# Altium PCB PCBf.PcbDoc
Units mm, origin at the board's own origin, x right, y up, seen from the top; angles counter-clockwise.
Board outline 100 x 50 mm, 2 copper layers (Top Layer, Bottom Layer); 119 components, 58 nets, 324 pads, 0 vias.
Unrouted connection lines stored in the file: 246.
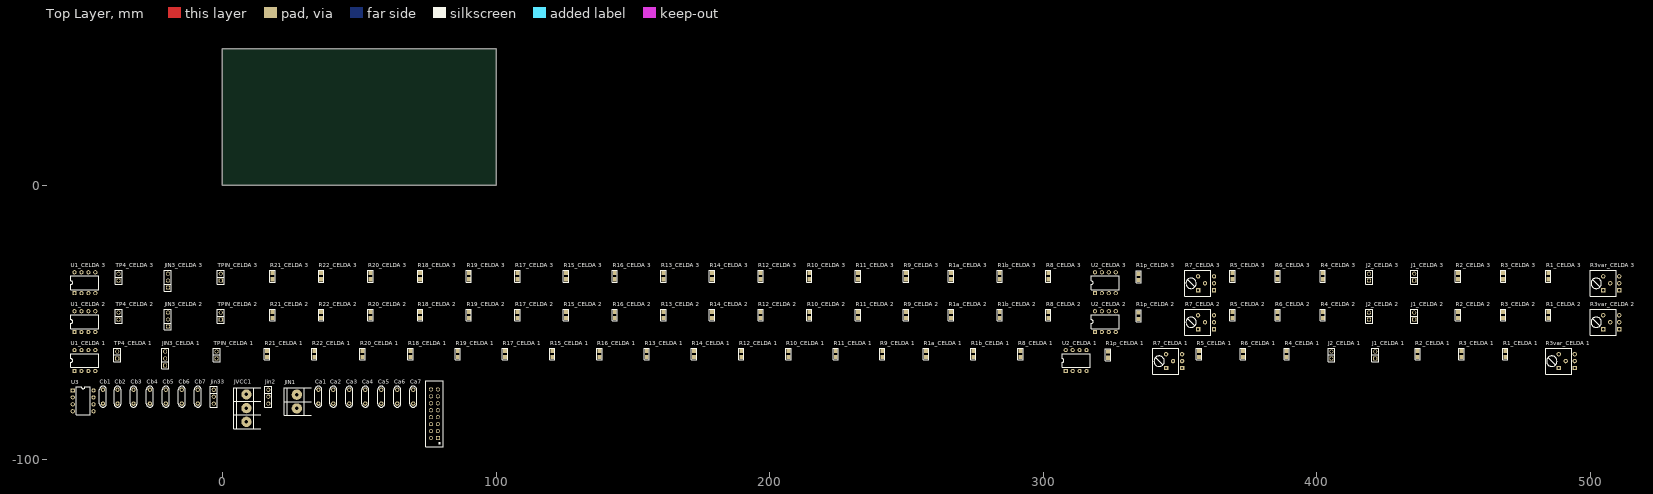
[diagram p0: Top Layer view]
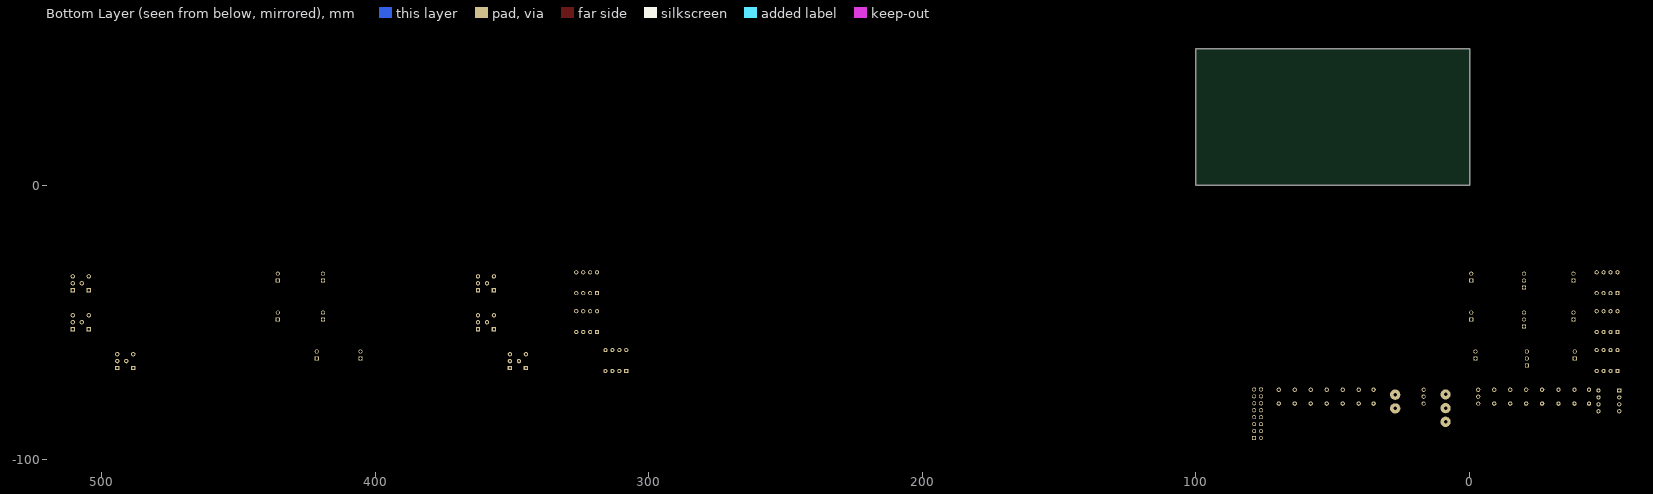
[diagram p1: Bottom Layer view, seen from below]

## Layer stack, top to bottom
Top Solder: solder mask 0.0102, Solder Resist, Dk 3.5
Top Layer: signal copper 0.0356
Dielectric 1: dielectric 0.32, FR-4, Dk 4.8
Bottom Layer: signal copper 0.0356
Bottom Solder: solder mask 0.0102, Solder Resist, Dk 3.5

## Board outline
0,0 100,0 100,50 0,50

## Design rules (kind name [scope] priority, off if disabled: settings)
Clearance [All] p1: gap=0.254 ignorepadtopadclearanceinfootprint=FALSE except(0: Arc-Hole Track-Hole SMDPad-Hole THPad-Hole Via-Hole Fill-Hole Poly-Hole Region-Hole Text-Hole)
PolygonConnect [All] p1: connectstyle=Relief reliefconductorwidth=0.254 reliefentries=4 polygonreliefangle="90 Angle" airgapwidth=0.254
RoomDefinition filter [InComponentClass('filter')] p1: confinementstyle=ConfineIn formatcopy=TRUE lockcomponents=FALSE outline -55.753,-95.758 80.899,-95.758 80.899,-70.612 -55.753,-70.612
RoomDefinition "CELDA 3" [InComponentClass('CELDA 3')] p2: confinementstyle=ConfineIn formatcopy=TRUE lockcomponents=FALSE outline -55.88,-40.767 519.811,-40.767 519.811,-27.94 -55.88,-27.94
RoomDefinition "CELDA 2" [InComponentClass('CELDA 2')] p3: confinementstyle=ConfineIn formatcopy=TRUE lockcomponents=FALSE outline -55.88,-54.991 519.811,-54.991 519.811,-42.164 -55.88,-42.164
RoomDefinition "CELDA 1" [InComponentClass('CELDA 1')] p4: confinementstyle=ConfineIn formatcopy=TRUE lockcomponents=FALSE outline -55.88,-69.215 503.047,-69.215 503.047,-56.388 -55.88,-56.388
RoutingVias [All] p1: holewidth=0.711 width=1.27 viastyle="Through Hole" minholewidth=0.711 minwidth=1.27 maxholewidth=0.711 maxwidth=1.27
SolderMaskExpansion [All] p1: expansion=0.102
Width [All] p1: maxlimit=0.254 minlimit=0.254 preferedwidth=0.254
30 further rules are at their usual default settings.

## Classes and differential pairs
channel class fleischerTowR1: "CELDA 1" "CELDA 2" "CELDA 3"
component class filter: Ca1 Ca2 Ca3 Ca4 Ca5 Ca6 Ca7 Cb1 Cb2 Cb3 Cb4 Cb5 Cb6 Cb7 JIN1 Jin2 Jin33 JVCC1 U3 ""
component class "CELDA 3": "J1_CELDA 3" "J2_CELDA 3" "JIN3_CELDA 3" "R1_CELDA 3" "R1a_CELDA 3" "R1b_CELDA 3" "R1p_CELDA 3" "R2_CELDA 3" "R3_CELDA 3" "R3var_CELDA 3" "R4_CELDA 3" "R5_CELDA 3" "R6_CELDA 3" "R7_CELDA 3" "R8_CELDA 3" "R9_CELDA 3" "R10_CELDA 3" "R11_CELDA 3" "R12_CELDA 3" "R13_CELDA 3" "R14_CELDA 3" "R15_CELDA 3" "R16_CELDA 3" "R17_CELDA 3" "R18_CELDA 3" "R19_CELDA 3" "R20_CELDA 3" "R21_CELDA 3" "R22_CELDA 3" "TP4_CELDA 3" "TPIN_CELDA 3" "U1_CELDA 3" "U2_CELDA 3"
component class "CELDA 2": "J1_CELDA 2" "J2_CELDA 2" "JIN3_CELDA 2" "R1_CELDA 2" "R1a_CELDA 2" "R1b_CELDA 2" "R1p_CELDA 2" "R2_CELDA 2" "R3_CELDA 2" "R3var_CELDA 2" "R4_CELDA 2" "R5_CELDA 2" "R6_CELDA 2" "R7_CELDA 2" "R8_CELDA 2" "R9_CELDA 2" "R10_CELDA 2" "R11_CELDA 2" "R12_CELDA 2" "R13_CELDA 2" "R14_CELDA 2" "R15_CELDA 2" "R16_CELDA 2" "R17_CELDA 2" "R18_CELDA 2" "R19_CELDA 2" "R20_CELDA 2" "R21_CELDA 2" "R22_CELDA 2" "TP4_CELDA 2" "TPIN_CELDA 2" "U1_CELDA 2" "U2_CELDA 2"
component class "CELDA 1": "J1_CELDA 1" "J2_CELDA 1" "JIN3_CELDA 1" "R1_CELDA 1" "R1a_CELDA 1" "R1b_CELDA 1" "R1p_CELDA 1" "R2_CELDA 1" "R3_CELDA 1" "R3var_CELDA 1" "R4_CELDA 1" "R5_CELDA 1" "R6_CELDA 1" "R7_CELDA 1" "R8_CELDA 1" "R9_CELDA 1" "R10_CELDA 1" "R11_CELDA 1" "R12_CELDA 1" "R13_CELDA 1" "R14_CELDA 1" "R15_CELDA 1" "R16_CELDA 1" "R17_CELDA 1" "R18_CELDA 1" "R19_CELDA 1" "R20_CELDA 1" "R21_CELDA 1" "R22_CELDA 1" "TP4_CELDA 1" "TPIN_CELDA 1" "U1_CELDA 1" "U2_CELDA 1"

## Components (designator, comment, footprint, x,y, rotation, side; value= is the part's Value field where it differs from the comment)
Ca1 "CAP" CAP200 35.052,-77.216 r90 top
Ca2 "CAP" CAP200 40.513,-77.216 r90 top
Ca3 "CAP" CAP200 46.355,-77.216 r90 top
Ca4 "CAP" CAP200 52.197,-77.216 r90 top
Ca5 "CAP" CAP200 58.039,-77.216 r90 top
Ca6 "CAP" CAP200 63.881,-77.216 r90 top
Ca7 "CAP" CAP200 69.723,-77.216 r90 top
Cb1 "CAP" CAP200 -43.688,-77.216 r90 top
Cb2 "CAP" CAP200 -38.354,-77.216 r90 top
Cb3 "CAP" CAP200 -32.512,-77.216 r90 top
Cb4 "CAP" CAP200 -26.543,-77.216 r90 top
Cb5 "CAP" CAP200 -20.701,-77.216 r90 top
Cb6 "CAP" CAP200 -14.859,-77.216 r90 top
Cb7 "CAP" CAP200 -9.017,-77.216 r90 top
"J1_CELDA 1" "C2" SIP2 421.386,-61.976 r90 top (schematic designator J1)
"J1_CELDA 2" "C2" SIP2 435.61,-47.752 r90 top (schematic designator J1)
"J1_CELDA 3" "C2" SIP2 435.61,-33.528 r90 top (schematic designator J1)
"J2_CELDA 1" "C1" SIP2 405.384,-61.976 r90 top (schematic designator J2)
"J2_CELDA 2" "C1" SIP2 419.1,-47.752 r90 top (schematic designator J2)
"J2_CELDA 3" "C1" SIP2 419.1,-33.528 r90 top (schematic designator J2)
JIN1 "BORNERA 2" BORNERA2 27.178,-78.994 r0 top
Jin2 "JUMPER" JUMPER3TH 16.764,-74.676 r0 top
"JIN3_CELDA 1" "JUMPER" JUMPER3 -20.955,-63.246 r90 top (schematic designator JIN3)
"JIN3_CELDA 2" "JUMPER" JUMPER3 -19.939,-49.022 r90 top (schematic designator JIN3)
"JIN3_CELDA 3" "JUMPER" JUMPER3 -19.939,-34.798 r90 top (schematic designator JIN3)
Jin33 "JUMPER" JUMPER3TH -3.175,-74.676 r0 top
JVCC1 "BORNERA 3" BORNERA3 8.763,-81.407 r0 top
"R1_CELDA 1" "RES" 0805 468.884,-61.595 r90 top (schematic designator R1)
"R1_CELDA 2" "RES" 0805 484.632,-47.371 r90 top (schematic designator R1)
"R1_CELDA 3" "RES" 0805 484.632,-33.147 r90 top (schematic designator R1)
"R1a_CELDA 1" "RES" 0805 257.175,-61.595 r90 top (schematic designator R1a)
"R1a_CELDA 2" "RES" 0805 266.319,-47.371 r90 top (schematic designator R1a)
"R1a_CELDA 3" "RES" 0805 266.319,-33.147 r90 top (schematic designator R1a)
"R1b_CELDA 1" "RES" 0805 274.447,-61.595 r90 top (schematic designator R1b)
"R1b_CELDA 2" "RES" 0805 284.099,-47.371 r90 top (schematic designator R1b)
"R1b_CELDA 3" "RES" 0805 284.099,-33.147 r90 top (schematic designator R1b)
"R1p_CELDA 1" "RES" 0805 323.723,-61.849 r90 top (schematic designator R1p)
"R1p_CELDA 2" "RES" 0805 334.899,-47.625 r90 top (schematic designator R1p)
"R1p_CELDA 3" "RES" 0805 334.899,-33.401 r90 top (schematic designator R1p)
"R2_CELDA 1" "RES" 0805 436.88,-61.595 r90 top (schematic designator R2)
"R2_CELDA 2" "RES" 0805 451.612,-47.371 r90 top (schematic designator R2)
"R2_CELDA 3" "RES" 0805 451.612,-33.147 r90 top (schematic designator R2)
"R3_CELDA 1" "RES" 0805 452.882,-61.595 r90 top (schematic designator R3)
"R3_CELDA 2" "RES" 0805 468.122,-47.371 r90 top (schematic designator R3)
"R3_CELDA 3" "RES" 0805 468.122,-33.147 r90 top (schematic designator R3)
"R3var_CELDA 1" "PRESET" "PRESET H" 488.442,-64.262 r90 top (schematic designator R3var)
"R3var_CELDA 2" "PRESET" "PRESET H" 504.698,-50.038 r90 top (schematic designator R3var)
"R3var_CELDA 3" "PRESET" "PRESET H" 504.698,-35.814 r90 top (schematic designator R3var)
"R4_CELDA 1" "RES" 0805 389.001,-61.595 r90 top (schematic designator R4)
"R4_CELDA 2" "RES" 0805 402.209,-47.371 r90 top (schematic designator R4)
"R4_CELDA 3" "RES" 0805 402.209,-33.147 r90 top (schematic designator R4)
"R5_CELDA 1" "RES" 0805 356.997,-61.595 r90 top (schematic designator R5)
"R5_CELDA 2" "RES" 0805 369.189,-47.371 r90 top (schematic designator R5)
"R5_CELDA 3" "RES" 0805 369.189,-33.147 r90 top (schematic designator R5)
"R6_CELDA 1" "RES" 0805 372.999,-61.595 r90 top (schematic designator R6)
"R6_CELDA 2" "RES" 0805 385.699,-47.371 r90 top (schematic designator R6)
"R6_CELDA 3" "RES" 0805 385.699,-33.147 r90 top (schematic designator R6)
"R7_CELDA 1" "PRESET" "PRESET H" 344.932,-64.262 r90 top (schematic designator R7)
"R7_CELDA 2" "PRESET" "PRESET H" 356.616,-50.038 r90 top (schematic designator R7)
"R7_CELDA 3" "PRESET" "PRESET H" 356.616,-35.814 r90 top (schematic designator R7)
"R8_CELDA 1" "RES" 0805 291.719,-61.595 r90 top (schematic designator R8)
"R8_CELDA 2" "RES" 0805 301.879,-47.371 r90 top (schematic designator R8)
"R8_CELDA 3" "RES" 0805 301.879,-33.147 r90 top (schematic designator R8)
"R9_CELDA 1" "RES" 0805 241.173,-61.595 r90 top (schematic designator R9)
"R9_CELDA 2" "RES" 0805 249.809,-47.371 r90 top (schematic designator R9)
"R9_CELDA 3" "RES" 0805 249.809,-33.147 r90 top (schematic designator R9)
"R10_CELDA 1" "RES" 0805 206.883,-61.595 r90 top (schematic designator R10)
"R10_CELDA 2" "RES" 0805 214.503,-47.371 r90 top (schematic designator R10)
"R10_CELDA 3" "RES" 0805 214.503,-33.147 r90 top (schematic designator R10)
"R11_CELDA 1" "RES" 0805 224.155,-61.595 r90 top (schematic designator R11)
"R11_CELDA 2" "RES" 0805 232.283,-47.371 r90 top (schematic designator R11)
"R11_CELDA 3" "RES" 0805 232.283,-33.147 r90 top (schematic designator R11)
"R12_CELDA 1" "RES" 0805 189.611,-61.595 r90 top (schematic designator R12)
"R12_CELDA 2" "RES" 0805 196.723,-47.371 r90 top (schematic designator R12)
"R12_CELDA 3" "RES" 0805 196.723,-33.147 r90 top (schematic designator R12)
"R13_CELDA 1" "RES" 0805 155.067,-61.595 r90 top (schematic designator R13)
"R13_CELDA 2" "RES" 0805 161.163,-47.371 r90 top (schematic designator R13)
"R13_CELDA 3" "RES" 0805 161.163,-33.147 r90 top (schematic designator R13)
"R14_CELDA 1" "RES" 0805 172.339,-61.595 r90 top (schematic designator R14)
"R14_CELDA 2" "RES" 0805 178.943,-47.371 r90 top (schematic designator R14)
"R14_CELDA 3" "RES" 0805 178.943,-33.147 r90 top (schematic designator R14)
"R15_CELDA 1" "RES" 0805 120.523,-61.595 r90 top (schematic designator R15)
"R15_CELDA 2" "RES" 0805 125.603,-47.371 r90 top (schematic designator R15)
"R15_CELDA 3" "RES" 0805 125.603,-33.147 r90 top (schematic designator R15)
"R16_CELDA 1" "RES" 0805 137.795,-61.595 r90 top (schematic designator R16)
"R16_CELDA 2" "RES" 0805 143.383,-47.371 r90 top (schematic designator R16)
"R16_CELDA 3" "RES" 0805 143.383,-33.147 r90 top (schematic designator R16)
"R17_CELDA 1" "RES" 0805 103.251,-61.595 r90 top (schematic designator R17)
"R17_CELDA 2" "RES" 0805 107.823,-47.371 r90 top (schematic designator R17)
"R17_CELDA 3" "RES" 0805 107.823,-33.147 r90 top (schematic designator R17)
"R18_CELDA 1" "RES" 0805 68.707,-61.595 r90 top (schematic designator R18)
"R18_CELDA 2" "RES" 0805 72.263,-47.371 r90 top (schematic designator R18)
"R18_CELDA 3" "RES" 0805 72.263,-33.147 r90 top (schematic designator R18)
"R19_CELDA 1" "RES" 0805 85.979,-61.595 r90 top (schematic designator R19)
"R19_CELDA 2" "RES" 0805 90.043,-47.371 r90 top (schematic designator R19)
"R19_CELDA 3" "RES" 0805 90.043,-33.147 r90 top (schematic designator R19)
"R20_CELDA 1" "RES" 0805 51.181,-61.595 r90 top (schematic designator R20)
"R20_CELDA 2" "RES" 0805 54.102,-47.371 r90 top (schematic designator R20)
"R20_CELDA 3" "RES" 0805 54.102,-33.147 r90 top (schematic designator R20)
"R21_CELDA 1" "RES" 0805 16.256,-61.595 r90 top (schematic designator R21)
"R21_CELDA 2" "RES" 0805 18.288,-47.371 r90 top (schematic designator R21)
"R21_CELDA 3" "RES" 0805 18.288,-33.147 r90 top (schematic designator R21)
"R22_CELDA 1" "RES" 0805 33.528,-61.595 r90 top (schematic designator R22)
"R22_CELDA 2" "RES" 0805 36.068,-47.371 r90 top (schematic designator R22)
"R22_CELDA 3" "RES" 0805 36.068,-33.147 r90 top (schematic designator R22)
"TP4_CELDA 1" "JUMPER" JUMPER2 -38.481,-61.976 r90 top (schematic designator TP4)
"TP4_CELDA 2" "JUMPER" JUMPER2 -37.973,-47.752 r90 top (schematic designator TP4)
"TP4_CELDA 3" "JUMPER" JUMPER2 -37.973,-33.528 r90 top (schematic designator TP4)
"TPIN_CELDA 1" "JUMPER" JUMPER2 -2.159,-61.976 r90 top (schematic designator TPIN)
"TPIN_CELDA 2" "JUMPER" JUMPER2 -0.635,-47.752 r90 top (schematic designator TPIN)
"TPIN_CELDA 3" "JUMPER" JUMPER2 -0.635,-33.528 r90 top (schematic designator TPIN)
"U1_CELDA 1" "LM833" DIP8 -54.102,-67.818 r90 top (schematic designator U1)
"U1_CELDA 2" "LM833" DIP8 -54.102,-53.594 r90 top (schematic designator U1)
"U1_CELDA 3" "LM833" DIP8 -54.102,-39.37 r90 top (schematic designator U1)
"U2_CELDA 1" "LM833" DIP8 308.229,-67.818 r90 top (schematic designator U2)
"U2_CELDA 2" "LM833" DIP8 318.897,-53.594 r90 top (schematic designator U2)
"U2_CELDA 3" "LM833" DIP8 318.897,-39.37 r90 top (schematic designator U2)
U3 "LM833" DIP8 -54.737,-74.93 r0 top
? "OUTPUT" SIP8*2 78.74,-92.329 r90 top

## Footprints (in the part's own frame and the unit in brackets; to place one, negate y for a bottom-side part, rotate by r counter-clockwise, add the part's x,y. Pads: shape width x height; smd on the part's side, far side on the other; paste and mask are expansions set on the pad)
0805 [mil] "Pasivo 0805"
  rect 60x56 smd: 1(-45,0) 2(45,0)
  silkscreen extent -85,-38 85,38, body extent -40,-25 39,25, height 15
BORNERA2 [mm] "Bornera con Tornillos 5mm separación"
  round 3.75 hole 1.3: 1(0,2.5) 2(0,-2.5)
  silkscreen extent -4.6,-5 5.2,5, body extent -3.76,-4.89 3.94,5.61, height 10
BORNERA3 [mm] "Bornera con Tornillos 5mm separación"
  round 3.75 hole 1.3: 1(0,5) 2(0,0) 3(0,-5)
  silkscreen extent -4.6,-7.5 5.2,7.5, body extent -3.76,-7.39 3.94,8.11, height 10.05
CAP200 [mil]
  round 62 hole 32: 1(-100,0) 2(100,0)
  silkscreen extent -150,-50 150,50, body extent -110,-46 110,44, height 246
DIP8 [mil]
  rect 60x60 hole 32: 1(0,0)
  round 60 hole 32: 2(0,-100) 3(0,-200) 4(0,-300) 5(300,-300) 6(300,-200) 7(300,-100) 8(300,0)
  silkscreen extent 50,-350 250,50, body extent -3,-363 303,63, height 177
JUMPER2 [mm]
  rect 1.5x1.5 hole 1.016: 1(-1.27,0)
  round 1.5 hole 1.016: 2(1.27,0)
  silkscreen extent -2.54,-1.27 2.54,1.27, body extent -2.46,-1.27 2.54,1.27, height 9.5
JUMPER3 [mm]
  rect 1.5x1.5 hole 1.016: 1(-2.54,0)
  round 1.5 hole 1.016: 2(0,0) 3(2.54,0)
  silkscreen extent -3.81,-1.27 3.81,1.27, body extent -3.81,-1.3 3.81,1.27, height 16.15
JUMPER3TH [mil]
  round 60 hole 38: 1(0,0) 2(0,-100) 3(0,-200)
  silkscreen extent -50,-250 50,50, body extent -49,-250 51,50, height 330
"PRESET H" [mil]
  rect 62x62 hole 32: 1(-98.43,-230) 1(-98.42,0)
  round 62 hole 32: 2(1.57,-100) 2(1.57,-230) 3(101.57,0) 3(101.57,-230)
  silkscreen extent -186,-185 189,190, body extent -190,-188 185,188, height 197
SIP2 [mm]
  rect 1.5x1.5 hole 1.016: 1(-1.27,0)
  round 1.5 hole 1.016: 2(1.27,0)
  silkscreen extent -2.54,-1.27 2.54,1.27
SIP8*2 [mm]
  rect 1.5x1.5 hole 1.016: 1(0,0)
  round 1.5 hole 1.016: 2(0,2.54) 3(2.54,0) 4(2.54,2.54) 5(5.08,0) 6(5.08,2.54) 7(7.62,0) 8(7.62,2.54) 9(10.16,0) 10(10.16,2.54) 11(12.7,0) 12(12.7,2.54) 13(15.24,0) 14(15.24,2.54) 15(17.78,0) 16(17.78,2.54)
  silkscreen extent -3.18,-1.91 20.95,4.45, body extent -1.26,-1.3 19.06,3.78, height 10.1

## Part data
"J1_CELDA 1" "J1_CELDA 2" "J1_CELDA 3" "J2_CELDA 1" "J2_CELDA 2" "J2_CELDA 3": library part CON2
Jin2 Jin33: library part JUMPER3TH, "TIRA DE PINES 1x3"
"JIN3_CELDA 1" "JIN3_CELDA 2" "JIN3_CELDA 3": library part JUMPER3
"U1_CELDA 1" "U1_CELDA 2" "U1_CELDA 3" "U2_CELDA 1" "U2_CELDA 2" "U2_CELDA 3" U3: "Dual Audio Operational Amplifier"
?: library part CON8*2

## Nets (pads, with @x,y where several pads share a name; then routed paths per layer and width w, separated by ;. In a path a pad name is that pad's centre, name@x,y a point inside that pad or via, vN(x,y) a via of type N, cw(c..) or ccw(c..) an arc to the next point about the centre after c; other vN are vias at no path point)
GND: "U1_CELDA 1.5" "U1_CELDA 2.5" "U1_CELDA 3.5" "U2_CELDA 1.3" "U2_CELDA 1.5" "U2_CELDA 2.3" "U2_CELDA 2.5" "U2_CELDA 3.3" "U2_CELDA 3.5" ?.13 ?.14 ?.15 ?.16 Ca1.2 Ca2.2 Ca3.2 Ca4.2 Ca5.2 Ca6.2 Ca7.2 Cb1.2 Cb2.2 Cb3.2 Cb4.2 Cb5.2 Cb6.2 Cb7.2 JIN1.2 JVCC1.2 U3.5
NetCb2_1: Cb2.1 Cb3.1 Cb4.1 Cb5.1 Cb6.1 Cb7.1
"NetJ1_CELDA 1_1": "J1_CELDA 1.1" "R8_CELDA 1.2" "R11_CELDA 1.2" "R20_CELDA 1.2" "R22_CELDA 1.2" "U2_CELDA 1.2"
"NetJ1_CELDA 1_2": "J1_CELDA 1.2" "R1_CELDA 1.2" "R3_CELDA 1.2" "R3var_CELDA 1.3" "U2_CELDA 1.1"
"NetJ1_CELDA 2_1": "J1_CELDA 2.1" "R8_CELDA 2.2" "R11_CELDA 2.2" "R20_CELDA 2.2" "R22_CELDA 2.2" "U2_CELDA 2.2"
"NetJ1_CELDA 2_2": "J1_CELDA 2.2" "R1_CELDA 2.2" "R3_CELDA 2.2" "R3var_CELDA 2.3" "U2_CELDA 2.1"
"NetJ1_CELDA 3_1": "J1_CELDA 3.1" "R8_CELDA 3.2" "R11_CELDA 3.2" "R20_CELDA 3.2" "R22_CELDA 3.2" "U2_CELDA 3.2"
"NetJ1_CELDA 3_2": "J1_CELDA 3.2" "R1_CELDA 3.2" "R3_CELDA 3.2" "R3var_CELDA 3.3" "U2_CELDA 3.1"
"NetJ2_CELDA 1_1": "J2_CELDA 1.1" "R1_CELDA 1.1" "R1a_CELDA 1.1" "R1p_CELDA 1.1" "R2_CELDA 1.1" "R3var_CELDA 1.2" "R7_CELDA 1.2" "R12_CELDA 1.2" "R16_CELDA 1.2" "U1_CELDA 1.6"
"NetJ2_CELDA 1_2": "J2_CELDA 1.2" "R1b_CELDA 1.2" "R1p_CELDA 1.2" "R7_CELDA 1.3"
"NetJ2_CELDA 2_1": "J2_CELDA 2.1" "R1_CELDA 2.1" "R1a_CELDA 2.1" "R1p_CELDA 2.1" "R2_CELDA 2.1" "R3var_CELDA 2.2" "R7_CELDA 2.2" "R12_CELDA 2.2" "R16_CELDA 2.2" "U1_CELDA 2.6"
"NetJ2_CELDA 2_2": "J2_CELDA 2.2" "R1b_CELDA 2.2" "R1p_CELDA 2.2" "R7_CELDA 2.3"
"NetJ2_CELDA 3_1": "J2_CELDA 3.1" "R1_CELDA 3.1" "R1a_CELDA 3.1" "R1p_CELDA 3.1" "R2_CELDA 3.1" "R3var_CELDA 3.2" "R7_CELDA 3.2" "R12_CELDA 3.2" "R16_CELDA 3.2" "U1_CELDA 3.6"
"NetJ2_CELDA 3_2": "J2_CELDA 3.2" "R1b_CELDA 3.2" "R1p_CELDA 3.2" "R7_CELDA 3.3"
"NetJIN3_CELDA 1_1": "JIN3_CELDA 1.1" "TP4_CELDA 1.1" "TP4_CELDA 1.2" "U1_CELDA 1.1" "U1_CELDA 1.2"
"NetJIN3_CELDA 2_1": "JIN3_CELDA 2.1" "TP4_CELDA 2.1" "TP4_CELDA 2.2" "U1_CELDA 2.1" "U1_CELDA 2.2"
"NetJIN3_CELDA 3_1": "JIN3_CELDA 3.1" "TP4_CELDA 3.1" "TP4_CELDA 3.2" "U1_CELDA 3.1" "U1_CELDA 3.2"
"NetR1a_CELDA 1_2": "R1a_CELDA 1.2" "R1b_CELDA 1.1"
"NetR1a_CELDA 2_2": "R1a_CELDA 2.2" "R1b_CELDA 2.1"
"NetR1a_CELDA 3_2": "R1a_CELDA 3.2" "R1b_CELDA 3.1"
"NetR2_CELDA 1_2": "R2_CELDA 1.2" "R3_CELDA 1.1"
"NetR2_CELDA 2_2": "R2_CELDA 2.2" "R3_CELDA 2.1"
"NetR2_CELDA 3_2": "R2_CELDA 3.2" "R3_CELDA 3.1"
"NetR4_CELDA 1_1": "R4_CELDA 1.1" "R5_CELDA 1.1" "R9_CELDA 1.2" "R14_CELDA 1.2" "R17_CELDA 1.2" "R19_CELDA 1.2" "U2_CELDA 1.6"
"NetR4_CELDA 2_1": "R4_CELDA 2.1" "R5_CELDA 2.1" "R9_CELDA 2.2" "R14_CELDA 2.2" "R17_CELDA 2.2" "R19_CELDA 2.2" "U2_CELDA 2.6"
"NetR4_CELDA 3_1": "R4_CELDA 3.1" "R5_CELDA 3.1" "R9_CELDA 3.2" "R14_CELDA 3.2" "R17_CELDA 3.2" "R19_CELDA 3.2" "U2_CELDA 3.6"
"NetR5_CELDA 1_2": "R5_CELDA 1.2" "R6_CELDA 1.1"
"NetR5_CELDA 2_2": "R5_CELDA 2.2" "R6_CELDA 2.1"
"NetR5_CELDA 3_2": "R5_CELDA 3.2" "R6_CELDA 3.1"
"NetR9_CELDA 1_1": "R9_CELDA 1.1" "R13_CELDA 1.1" "U1_CELDA 1.7"
"NetR9_CELDA 2_1": "R9_CELDA 2.1" "R13_CELDA 2.1" "U1_CELDA 2.7"
"NetR9_CELDA 3_1": "R9_CELDA 3.1" "R13_CELDA 3.1" "U1_CELDA 3.7"
"NetR10_CELDA 1_2": "R10_CELDA 1.2" "R11_CELDA 1.1"
"NetR10_CELDA 2_2": "R10_CELDA 2.2" "R11_CELDA 2.1"
"NetR10_CELDA 3_2": "R10_CELDA 3.2" "R11_CELDA 3.1"
"NetR13_CELDA 1_2": "R13_CELDA 1.2" "R14_CELDA 1.1"
"NetR13_CELDA 2_2": "R13_CELDA 2.2" "R14_CELDA 2.1"
"NetR13_CELDA 3_2": "R13_CELDA 3.2" "R14_CELDA 3.1"
"NetR15_CELDA 1_2": "R15_CELDA 1.2" "R16_CELDA 1.1"
"NetR15_CELDA 2_2": "R15_CELDA 2.2" "R16_CELDA 2.1"
"NetR15_CELDA 3_2": "R15_CELDA 3.2" "R16_CELDA 3.1"
"NetR18_CELDA 1_2": "R18_CELDA 1.2" "R19_CELDA 1.1"
"NetR18_CELDA 2_2": "R18_CELDA 2.2" "R19_CELDA 2.1"
"NetR18_CELDA 3_2": "R18_CELDA 3.2" "R19_CELDA 3.1"
"NetR21_CELDA 1_2": "R21_CELDA 1.2" "R22_CELDA 1.1"
"NetR21_CELDA 2_2": "R21_CELDA 2.2" "R22_CELDA 2.1"
"NetR21_CELDA 3_2": "R21_CELDA 3.2" "R22_CELDA 3.1"
NetU3_6: U3.6 U3.7
VCC: "U1_CELDA 1.8" "U1_CELDA 2.8" "U1_CELDA 3.8" "U2_CELDA 1.8" "U2_CELDA 2.8" "U2_CELDA 3.8" Ca1.1 Ca2.1 Ca3.1 Ca4.1 Ca5.1 Ca6.1 Ca7.1 JVCC1.1 U3.8
VEE: "U1_CELDA 1.4" "U1_CELDA 2.4" "U1_CELDA 3.4" "U2_CELDA 1.4" "U2_CELDA 2.4" "U2_CELDA 3.4" Cb1.1 JVCC1.3 U3.4
Vi2: "JIN3_CELDA 2.3" "TPIN_CELDA 2.1" "TPIN_CELDA 2.2" "U1_CELDA 2.3" Jin2.2
Vi3: "JIN3_CELDA 3.3" "TPIN_CELDA 3.1" "TPIN_CELDA 3.2" "U1_CELDA 3.3" Jin33.2
VIN: "JIN3_CELDA 1.3" "TPIN_CELDA 1.1" "TPIN_CELDA 1.2" "U1_CELDA 1.3" JIN1.1 Jin2.1 Jin33.1
VinFT: "JIN3_CELDA 1.2" "JIN3_CELDA 2.2" "JIN3_CELDA 3.2" "R12_CELDA 1.1" "R12_CELDA 2.1" "R12_CELDA 3.1" "R15_CELDA 1.1" "R15_CELDA 2.1" "R15_CELDA 3.1" "R17_CELDA 1.1" "R17_CELDA 2.1" "R17_CELDA 3.1" "R18_CELDA 1.1" "R18_CELDA 2.1" "R18_CELDA 3.1" "R20_CELDA 1.1" "R20_CELDA 2.1" "R20_CELDA 3.1" "R21_CELDA 1.1" "R21_CELDA 2.1" "R21_CELDA 3.1"
Vo1: "R4_CELDA 1.2" "R6_CELDA 1.2" "R8_CELDA 1.1" "R10_CELDA 1.1" "U2_CELDA 1.7" Jin2.3
Vo2: "R4_CELDA 2.2" "R6_CELDA 2.2" "R8_CELDA 2.1" "R10_CELDA 2.1" "U2_CELDA 2.7" Jin33.3
Vo3: "R4_CELDA 3.2" "R6_CELDA 3.2" "R8_CELDA 3.1" "R10_CELDA 3.1" "U2_CELDA 3.7" ?.7 ?.8 U3.3
VOUT: ?.1 ?.2 U3.1 U3.2
pads on no net: "R3var_CELDA 1.1" "R3var_CELDA 2.1" "R3var_CELDA 3.1" "R7_CELDA 1.1" "R7_CELDA 2.1" "R7_CELDA 3.1" ?.3 ?.4 ?.5 ?.6 ?.9 ?.10 ?.11 ?.12